# Allegro board P1_NECULA_ADRIAN.brd
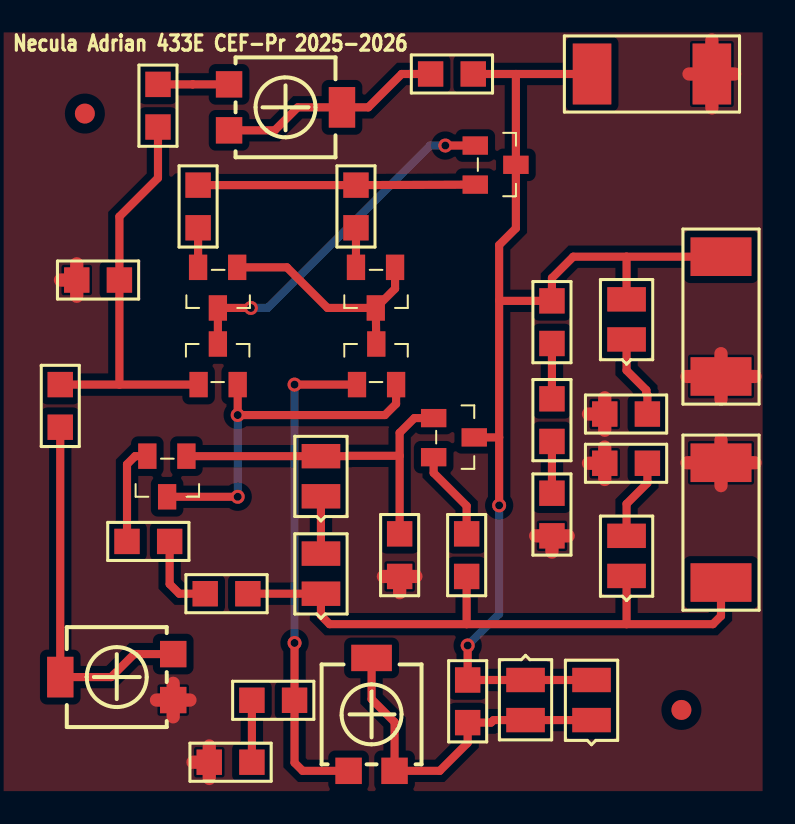
[diagram p0: board, top side]
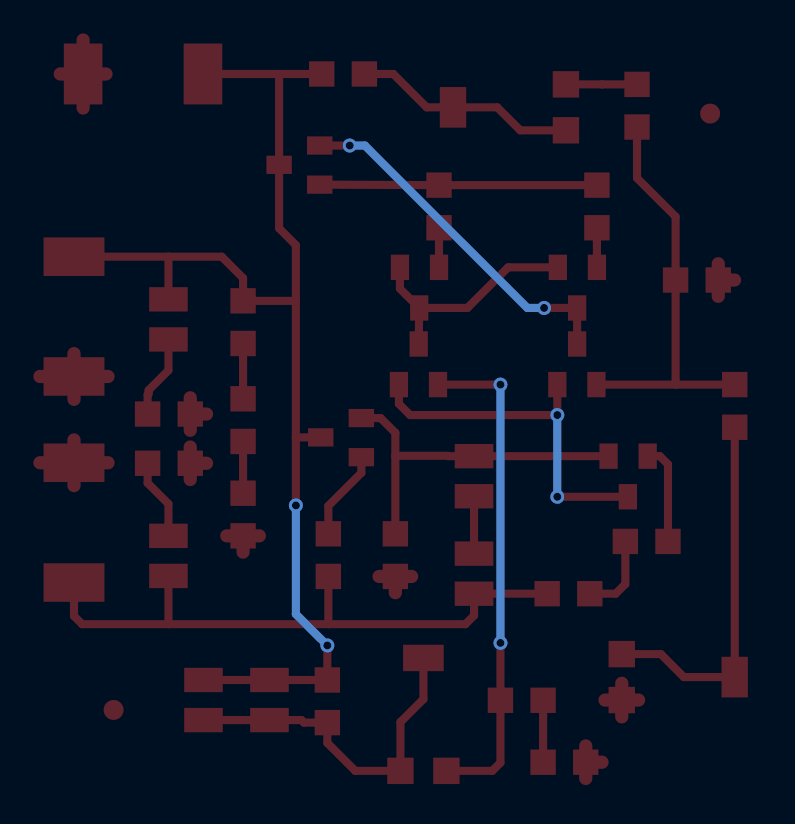
[diagram p1: board, bottom side, seen from below]

No outline. copper layers: TOP, BOTTOM. Coordinates in mm from the lowest, leftmost part position.

## Design rules (mm)
nets with their own width: min track width 0.406; nets N01486 N01498 N01502 N01620 N01628 N01656 N01660 N01678 N01690 N01715 N01830 N01888 N01986 N02588 N02856 N03421 N03933 N03960 N04009 N04062 N04621 N06490 N07459 N15176
nets with their own width: min track width 0.66; nets GND

## Placement (name value [footprint] x y rotation side)
C1  2.2n  [SMC0805]  22.38 36.91 0 top
C2  2.2n  [SMC0805]  4.67 26.59 0 top
D1  1N4148  [SMD0805]  16.89 15.77 90 top
D2  1N4148  [SMD0805]  16.89 10.9 90 top
D3  1N4148  [SMD0805]  27.13 6.58 270 top
D4  1N4148  [SMD0805]  30.43 4.57 90 top
LED1  OF-SMD2012B  [SMD0805]  32.18 23.62 90 top
LED2  OF-SMD2012B  [SMD0805]  32.18 11.79 90 top
NOREF  -  []  0 0 0 top
NOREF#2  -  [unnamed#2]  5.08 34.92 0 top
NOREF#3  -  [unnamed#2]  34.92 5.08 0 top
NOREF#4  -  []  40.01 0 90 top
P1  10k  [TS53YL]  12.29 34.09 180 top
P2  10k  [TS53YL]  9.5 7.87 0 top
P3  10k  [TS53YL]  20.57 2.03 270 top
R1  1k  [SMR0805]  8.74 34.25 90 top
R2  1k  [SMR0805]  3.85 19.23 90 top
R3  100  [SMR0805]  18.64 31.34 270 top
R4  100  [SMR0805]  10.74 31.34 270 top
R5  510  [SMR0805]  7.19 13.51 0 top
R6  100  [SMR0805]  11.1 10.9 0 top
R7  1k  [SMR0805]  20.83 13.89 270 top
R8  100  [SMR0805]  24.18 13.89 270 top
R9  10k  [SMR0805]  15.57 5.56 180 top
R10  1k  [SMR0805]  13.44 2.46 180 top
R11  22k  [SMR0805]  24.23 4.45 90 top
R12  470  [SMR0805]  33.22 19.89 180 top
R13  470  [SMR0805]  31.09 17.42 0 top
RL1  15k  [SMR0805]  28.45 25.55 270 top
RL2  3.9k  [SMR0805]  28.45 20.65 270 top
RL3  100  [SMR0805]  28.45 15.93 270 top
T1  BC846BL  [TO236]  10.77 21.49 270 top
T2  BC846BL  [TO236]  18.69 21.49 270 top
T3  BC856BL  [TO236]  20.6 27.1 90 top
T4  BC856BL  [TO236]  12.7 27.1 90 top
T5  BC846BL  [TO236]  10.16 17.65 90 top
T6  BC856BL  [TO236]  24.74 33.32 180 top
T7  BC846BL  [TO236]  22.66 19.68 180 top
UNK+VCC  CON2  [SMR2512]  36.91 27.76 270 top
UNK-VCC  CON2  [SMR2512]  36.91 17.45 270 top
VOUT  CON2  [SMR2512]  30.45 36.91 0 top

## Library data of the parts
C1 C2 = CAP NP
D1-D4 = DIODE_0
LED1 LED2 = LED_0
P1-P3 = POT
R1-R13 RL1-RL3 = R
T1 T2 T5 T7 = BC846BL_0
T3 T4 T6 = BC856BL_1
UNK+VCC UNK-VCC VOUT = CON2_0

## Footprints (pads in the part's own frame, mm; a bottom-side part is the same pattern mirrored in y, then rotated)
SMC0805
  rect 1.27x1.27 smd: 1(0,0) 2(2.134,0)
SMD0805
  rect 1.219x1.93 smd: A(2.007,0) C(0,0)
SMR0805
  rect 1.27x1.27 smd: 1(0,0) 2(2.134,0)
SMR2512
  rect 1.93x3.048 smd: 1(0,0) 2(5.994,0)
TO236
  rect 1.27x0.914 smd: 1(0.127,0) 2(0.127,1.956) 3(-1.905,0.965)
TS53YL
  rect 1.321x1.321 smd: 1(0,0) 3(0,-2.3)
  rect 1.321x2.032 smd: 2(-5.65,-1.15)
unnamed#2
  round 1 smd: (0,0)

## Nets
GND: C2.1 P2.3 R7.2 R10.2 R12.2 R13.1 RL3.2 UNK+VCC.2 UNK-VCC.1 VOUT.2
N01486: R3.1 R4.1 T6.2(E)
N01498: R4.2 T4.2(E)
N01502: R3.2 T3.2(E)
N01620: T2.3 T3.1 T3.3 T4.1
N01628: T1.2(EMITTER) T2.2(EMITTER) T5.3
N01656: R5.2 R6.1
N01660: D2.C LED2.C R6.2 R8.2 UNK-VCC.2
N01678: D1.C D2.A
N01690: D1.A R7.1 T5.1 T7.1
N01715: R8.1 T7.2(EMITTER)
N01830: T1.3 T4.3 T6.1
N01888: RL2.2 RL3.1
N01986: R5.1 T5.2(EMITTER)
N02588: C2.2 R1.1 R2.2 T1.1
N02856: P2.1 P2.2(WIPER) R2.1
N03421: P1.3 R1.2
N03933: R9.2 R10.1
N03960: P3.3 R9.1 T2.1
N04009: D3.A D4.C P3.1 P3.2(WIPER) R11.1
N04062: C1.2 D3.C D4.A LED1.A R11.2 RL1.1 T6.3 T7.3 UNK+VCC.1 VOUT.1
N04621: RL1.2 RL2.1
N06490: LED2.A R13.2
N07459: LED1.C R12.1
N15176: C1.1 P1.1 P1.2(WIPER)

## Via types
v1: diameter 0.7, hole 0.4, TOP to BOTTOM, 8 vias

## Routing (per net, layer and track width the routed paths; a pad name or vN(x,y) marks a point on that pad's centre or on a via; arc(x,y) is an arc through that point)
GND: length 35.1
  TOP w0.66: 35.31,36.91 VOUT.2 ; VOUT.2 36.45,38.61 ; VOUT.2 37.59,36.91 ; VOUT.2 36.45,35.2 ; 27.63,13.79 RL3.2 ; RL3.2 29.26,13.79 ; RL3.2 28.45,12.98 ; UNK+VCC.2 38.61,21.77 ; UNK+VCC.2 36.91,22.91 ; UNK+VCC.2 36.91,20.62 ; UNK+VCC.2 35.2,21.77 ; 20.83,10.95 R7.2 ; R7.2 21.64,11.76 ; R7.2 20.01,11.76 ; P2.3 10.34,5.57 ; P2.3 8.66,5.57 ; P2.3 9.5,4.74 ; P2.3 9.5,6.41 ; R12.2 31.09,20.7 ; R12.2 31.09,19.07 ; R12.2 30.28,19.89 ; C2.1 4.67,27.41 ; C2.1 4.67,25.78 ; C2.1 3.86,26.59 ; 36.91,16.31 UNK-VCC.1 ; UNK-VCC.1 36.91,18.59 ; UNK-VCC.1 35.2,17.45 ; UNK-VCC.1 38.61,17.45 ; R13.1 31.09,18.24 ; R13.1 30.28,17.42 ; R13.1 31.09,16.61 ; 10.49,2.46 R10.2 ; R10.2 11.3,3.28 ; R10.2 11.3,1.65
N01486: length 13.9
  TOP w0.406: 24.61,31.37 R3.1 R4.1
N01498: length 2
  TOP w0.406: R4.2 T4.2
N01502: length 2
  TOP w0.406: R3.2 T3.2
N01620: length 12
  TOP w0.406: T3.1 20.6,26.16 T3.3 ; T3.3 T2.3 ; T3.3 17.22,25.2 15.19,27.23 T4.1
N01628: length 18.3
  TOP w0.406: T5.3 v1(12.73,15.75) ; T2.2 20.65,20.4 20.09,19.84 v1(12.73,19.84) T1.2
  BOTTOM w0.406: v1(12.73,15.75) v1(12.73,19.84)
N01656: length 4.1
  TOP w0.406: R6.1 9.8,10.9 9.32,11.38 R5.2
N01660: length 31.6
  TOP w0.406: 32.18,9.37 24.18,9.37 ; 32.18,9.37 LED2.C ; 32.18,9.37 36.5,9.37 36.91,9.78 UNK-VCC.2 ; 24.18,9.37 R8.2 ; 24.18,9.37 17.32,9.37 16.89,9.8 D2.C R6.2
N01678: length 2.9
  TOP w0.406: D1.C D2.A
N01690: length 17.7
  TOP w0.406: 20.83,17.8 18.2,17.8 18.19,17.78 D1.A T5.1 ; 20.83,17.8 20.83,18.95 21.56,19.68 T7.1 ; 20.83,17.8 R7.1
N01715: length 4.5
  TOP w0.406: R8.1 24.18,15.29 22.53,16.94 T7.2
N01830: length 18
  TOP w0.406: v1(23.11,33.32) T6.1 ; v1(13.39,25.2) T4.3 T1.3
  BOTTOM w0.406: v1(23.11,33.32) 22.35,33.32 14.22,25.2 v1(13.39,25.2)
N01888: length 2.6
  TOP w0.406: RL2.2 RL3.1
N01986: length 5
  TOP w0.406: R5.1 7.19,17.37 7.59,17.78 T5.2
N02588: length 20.6
  TOP w0.406: T1.1 6.81,21.36 ; 6.81,21.36 R2.2 ; 6.81,21.36 C2.2 6.81,29.77 8.74,31.7 R1.1
N02856: length 18.6
  TOP w0.406: P2.1 7.54,7.87 6.39,6.72 P2.2 3.85,6.73 R2.1
N03421: length 3.6
  TOP w0.406: R1.2 10.48,36.39 P1.3
N03933: length 3.1
  TOP w0.406: R10.1 R9.2
N03960: length 24.9
  TOP w0.406: P3.3 15.98,2.03 15.57,2.44 R9.1 v1(15.57,8.43) ; v1(15.57,21.36) T2.1
  BOTTOM w0.406: v1(15.57,21.36) v1(15.57,8.43)
N04009: length 17.6
  TOP w0.406: D4.C D3.A 25.53,4.57 25.4,4.45 R11.1 24.23,3.43 22.83,2.03 P3.1 20.57,4.47 19.42,5.62 P3.2
N04062: length 59.5
  TOP w0.406: 25.81,18.72 v1(25.81,15.32) ; 25.81,18.72 T7.3 ; 25.81,18.72 25.81,25.55 ; v1(24.23,8.31) R11.2 D3.C D4.A ; 26.64,36.91 VOUT.1 ; 26.64,36.91 C1.2 ; 26.64,36.91 T6.3 26.64,29.18 25.81,28.35 25.81,25.55 ; 25.81,25.55 RL1.1 28.45,26.7 29.51,27.76 32.18,27.76 ; 32.18,27.76 LED1.A ; 32.18,27.76 UNK+VCC.1
  BOTTOM w0.406: v1(24.23,8.31) 25.81,9.88 v1(25.81,15.32)
N04621: length 2.8
  TOP w0.406: RL1.2 RL2.1
N06490: length 4.1
  TOP w0.406: R13.2 33.22,16.43 32.18,15.39 LED2.A
N07459: length 4.2
  TOP w0.406: R12.1 33.22,20.85 33.17,20.9 33.17,21.08 32.18,22.07 LED1.C
N15176: length 11.3
  TOP w0.406: C1.1 20.93,36.91 19.26,35.24 P1.2 15.73,35.24 14.58,34.09 P1.1

## Copper pours and planes (outline as drawn; the poured copper is in the pictures)
GND on TOP: 1.02,1.02 1.02,38.99 38.99,38.99 38.99,1.02 ; 4 cut-outs

## Text on the board
Ref Des/Silkscreen Top: Necula Adrian 433E CEF-Pr 2025-2026
MECHANICAL: *  SURFACE - AIR 0 MIL | L1 TOP CONDUCTOR - COPPER 0.709 MIL | *  DIELECTRIC - FR-4 61.574 MIL | L2 BOTTOM CONDUCTOR - COPPER 0.709 MIL | DESIGN CROSS SECTION CHART | ___________________________ | TOTAL THICKNESS 62.992 MIL | 1-2 | FIGURE | FINISHED_SIZE | 15.75 | DRILL CHART: TOP to BOTTOM | ALL UNITS ARE IN MILS | PLATED | QTY | 8
